# Altium PCB PCB1.PcbDoc
Units mm, origin at the board's own origin, x right, y up, seen from the top; angles counter-clockwise.
Board outline 90 x 65 mm, 2 copper layers (Top Layer, Bottom Layer); 58 components, 43 nets, 162 pads, 0 vias.
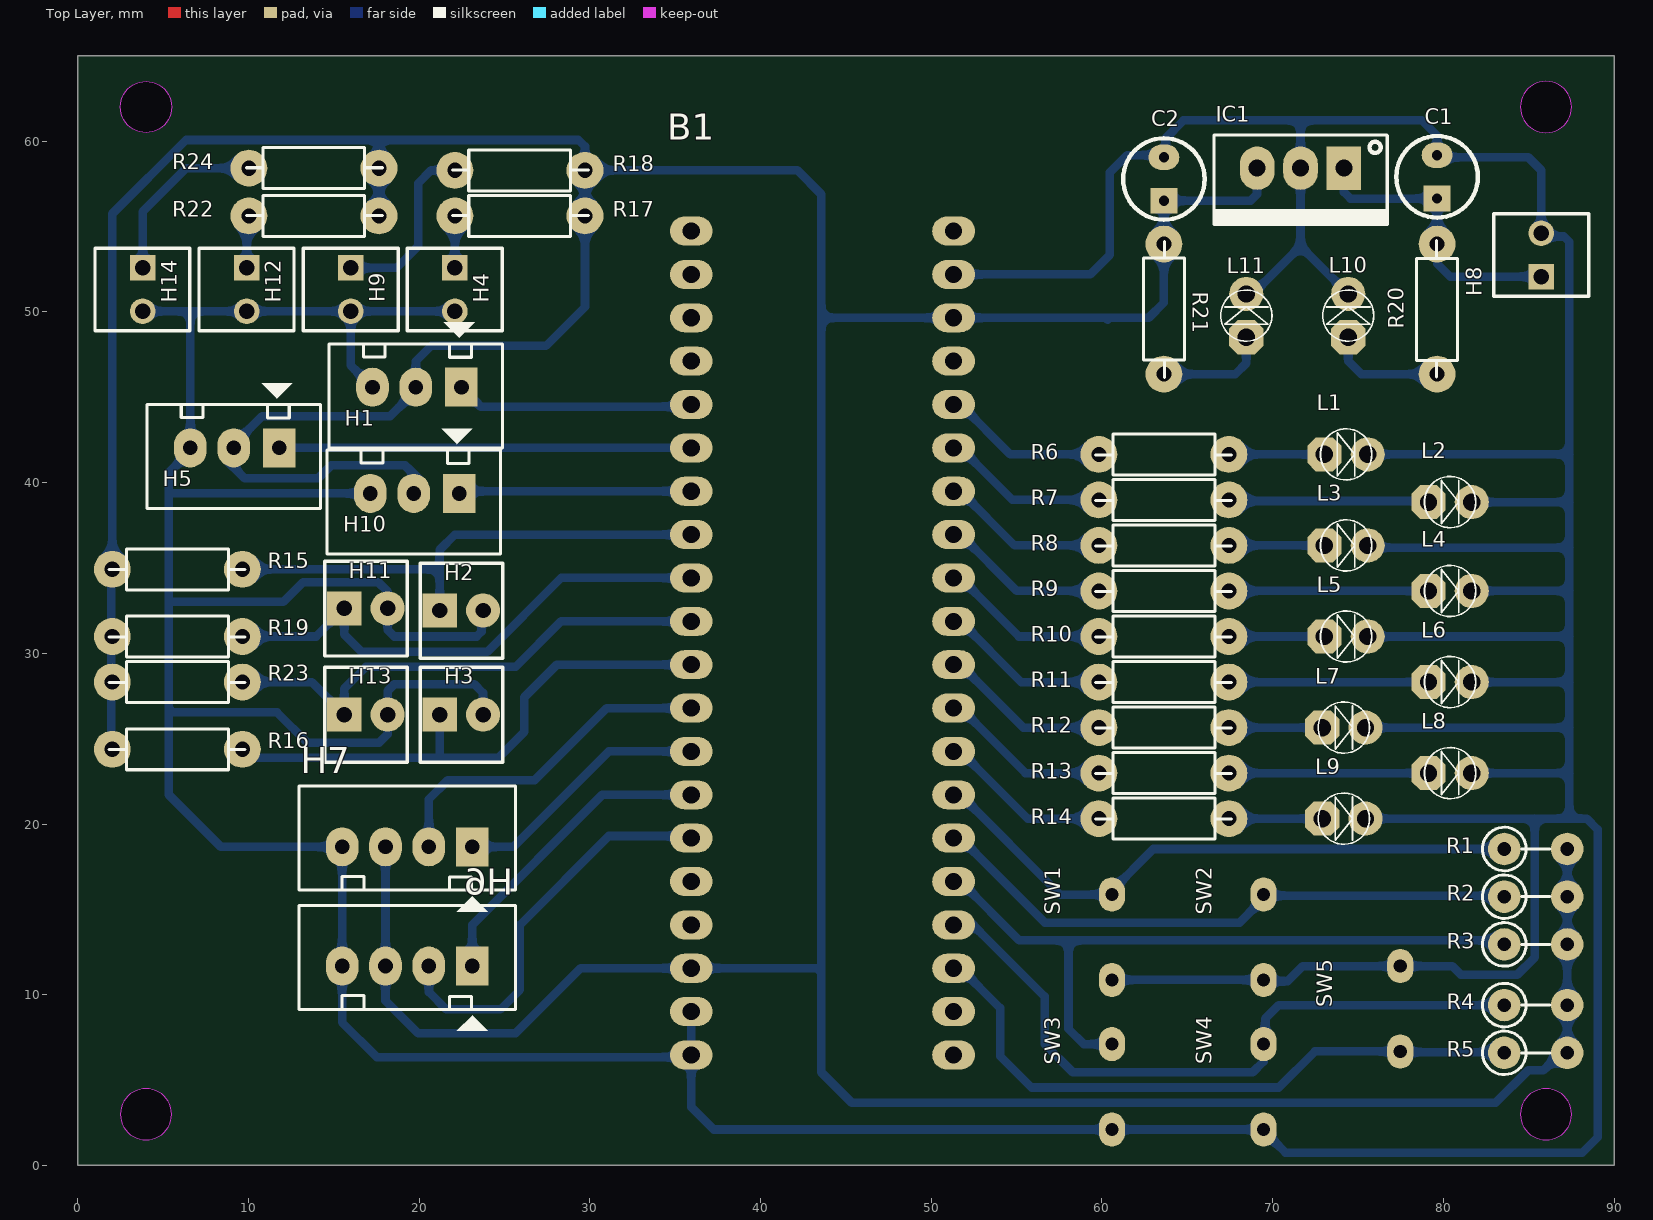
[diagram p0: Top Layer view]
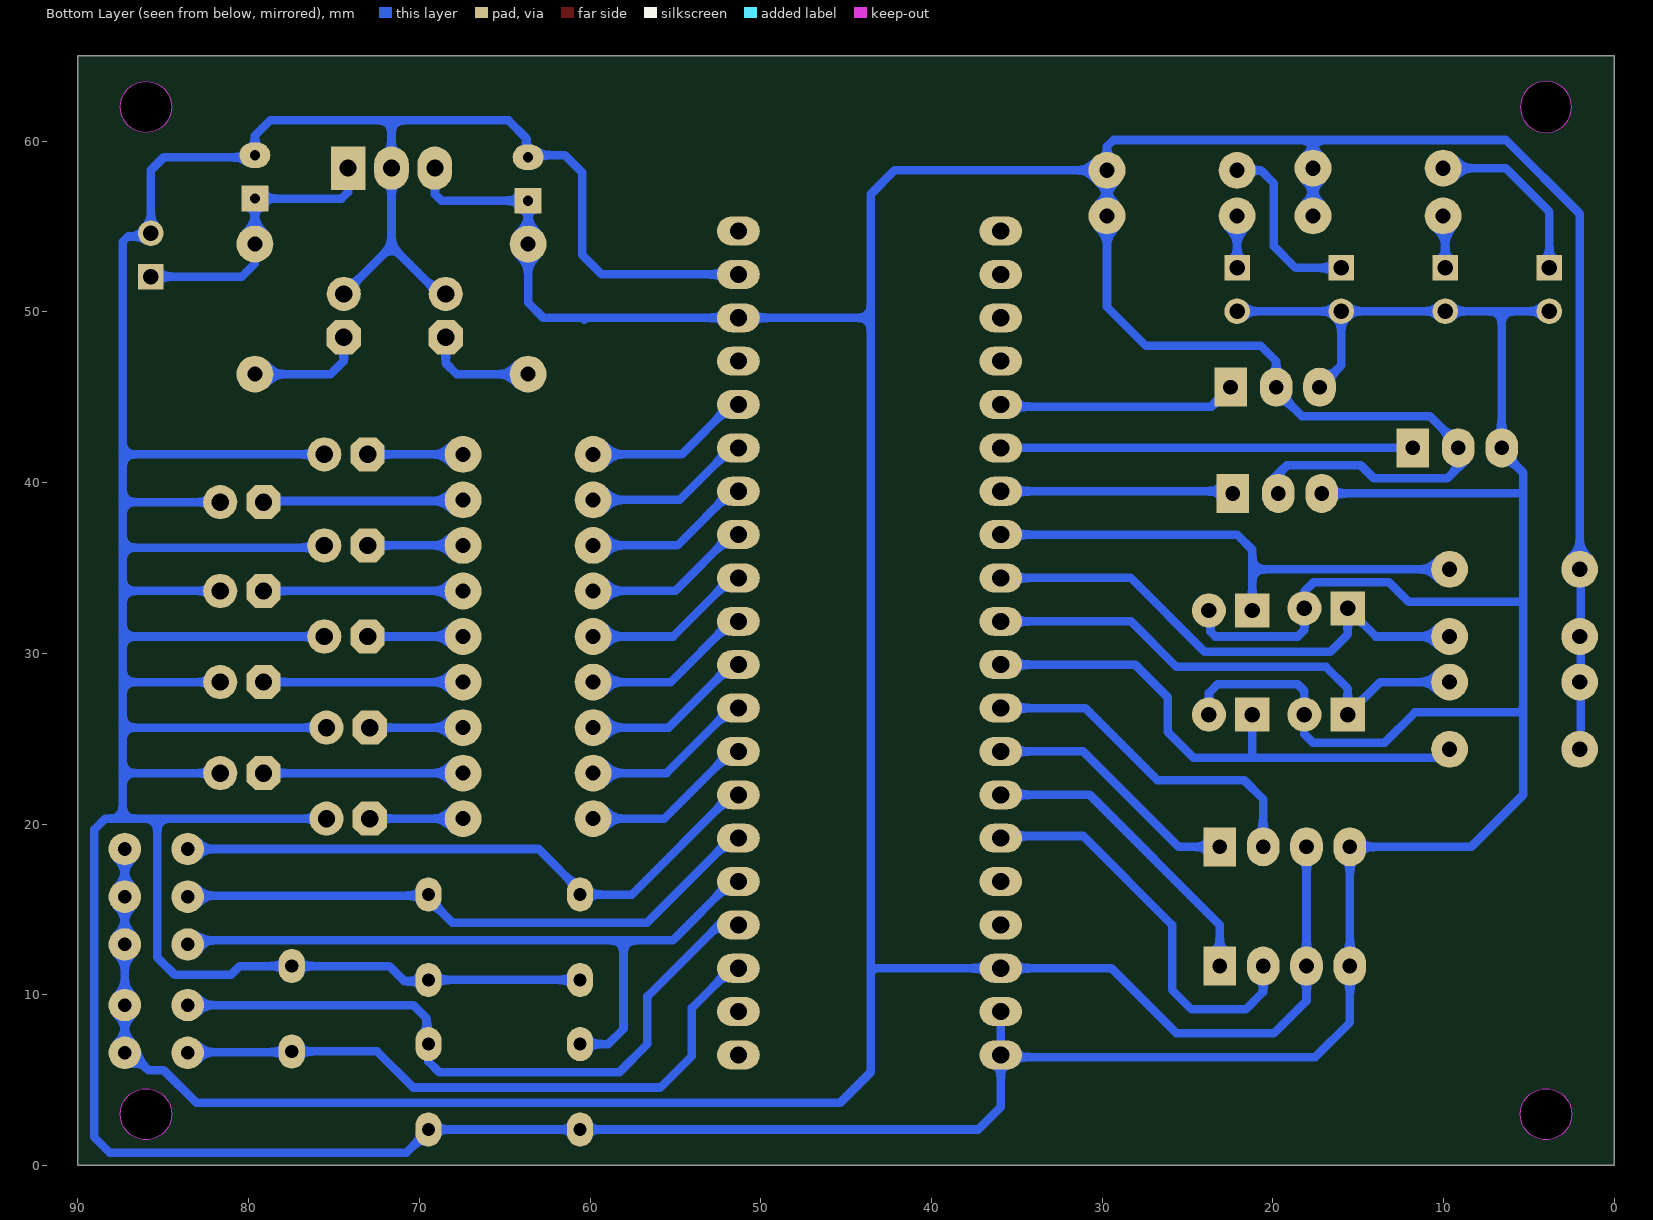
[diagram p1: Bottom Layer view, seen from below]
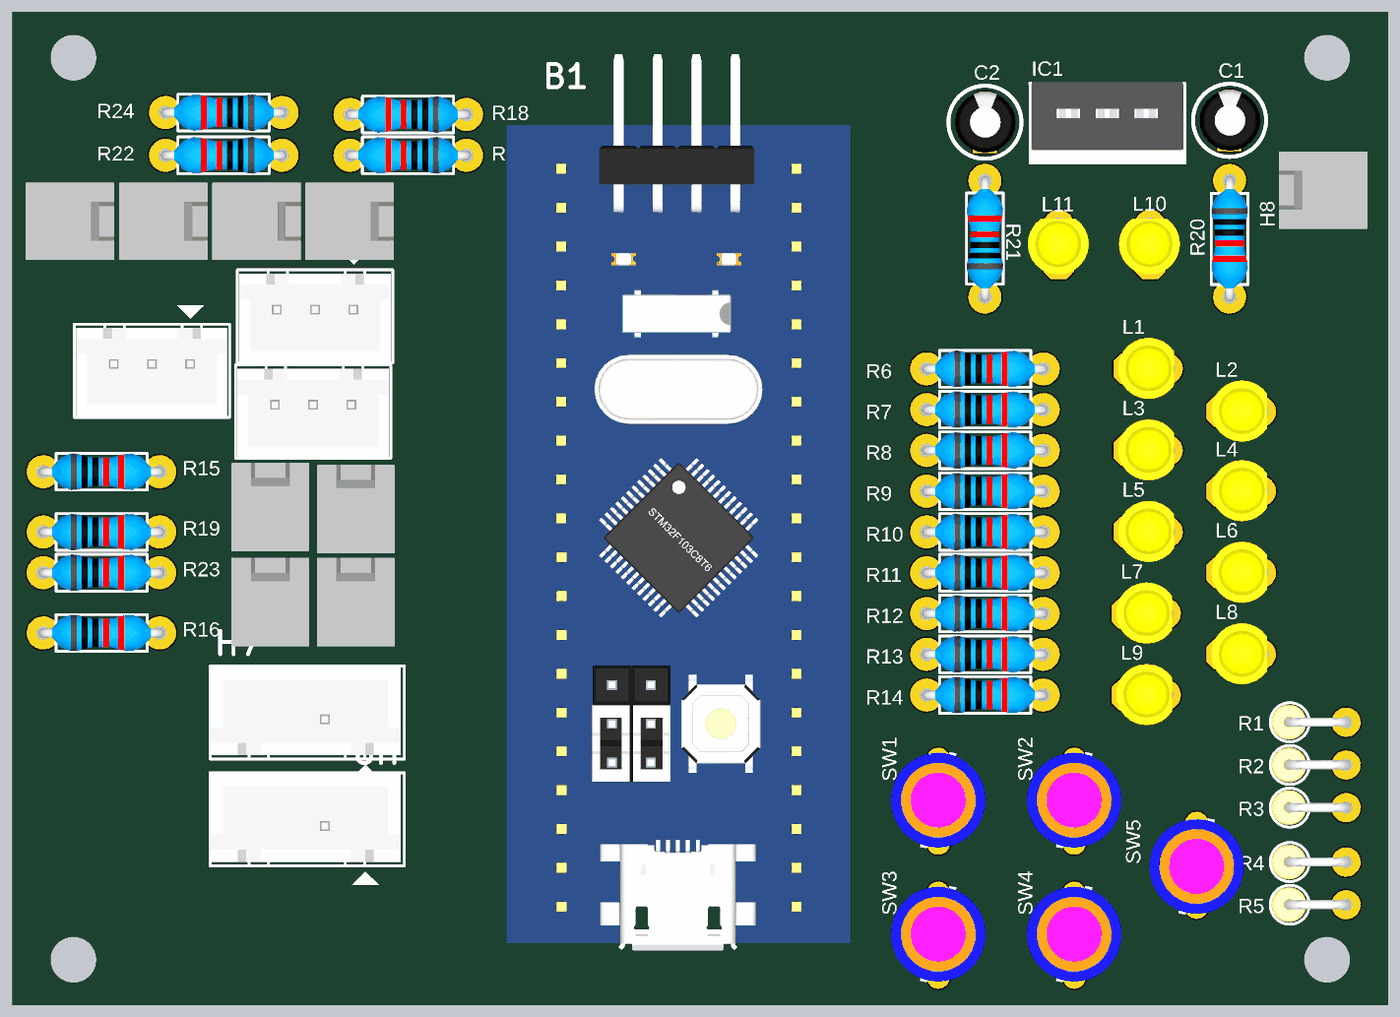
[diagram p2: 3D render of the assembled board from above, using the file's embedded part models]

## Layer stack, top to bottom
Top Solder: solder mask 0.0102, Solder Resist, Dk 3.5
Top Layer: signal copper 0.0356
Dielectric 1: dielectric 0.32, FR-4, Dk 4.8
Bottom Layer: signal copper 0.0356
Bottom Solder: solder mask 0.0102, Solder Resist, Dk 3.5

## Board outline
0.006,0.006 0.006,65.006 90.006,65.006 90.006,0.006
cut-out: 4.006,60.506 cw(c4.006,62.006) 2.506,62.006 cw(c4.006,62.006) 4.006,63.506 cw(c4.006,62.006) 5.506,62.006 cw(c4.006,62.006)
cut-out: 2.506,3.006 ccw(c4.006,3.006) 4.006,1.506 ccw(c4.006,3.006) 5.506,3.006 ccw(c4.006,3.006) 4.006,4.506 ccw(c4.006,3.006)
cut-out: 84.506,3.006 ccw(c86.006,3.006) 86.006,1.506 ccw(c86.006,3.006) 87.506,3.006 ccw(c86.006,3.006) 86.006,4.506 ccw(c86.006,3.006)
cut-out: 84.506,62.006 ccw(c86.006,62.006) 86.006,60.506 ccw(c86.006,62.006) 87.506,62.006 ccw(c86.006,62.006) 86.006,63.506 ccw(c86.006,62.006)

## Design rules (kind name [scope] priority, off if disabled: settings)
Clearance [All] p1: gap=0.254 ignorepadtopadclearanceinfootprint=FALSE except(0: Arc-Hole Track-Hole SMDPad-Hole THPad-Hole Via-Hole Fill-Hole Poly-Hole Region-Hole Text-Hole)
PolygonConnect [All] p1: connectstyle=Relief reliefconductorwidth=0.254 reliefentries=4 polygonreliefangle="90 Angle" airgapwidth=0.254
RoutingVias [All] p1: holewidth=0.711 width=1.27 viastyle="Through Hole" minholewidth=0.711 minwidth=1.27 maxholewidth=0.711 maxwidth=1.27
SolderMaskExpansion [All] p1: expansion=0.102
Width [All] p1: maxlimit=2 minlimit=0.5 preferedwidth=1 minimp=50.000000 maximp=50.000000 favimp=50.000000
30 further rules are at their usual default settings.

## Components (designator, comment, footprint, x,y, rotation, side; value= is the part's Value field where it differs from the comment)
B1 "STM32F103C8T6-BlueFill" STM32F1-Bluefill 51.308,54.737 r180 top
C1 "0.33" CA-ALU-2.54 79.629,57.912 r90 top value=104
C2 "0.1uF" CA-ALU-2.54 63.627,57.785 r90 top value=104
H1 "Header3" Header3 22.352,45.593 r180 top
H2 "Header2" HDR2#1 21.209,32.512 r0 top
H3 "Header2" HDR2#1 21.209,26.416 r0 top
H4 "Header2" HDR2#2 22.098,52.578 r270 top
H5 "Header3" Header3 11.684,42.037 r180 top
H6 "Header4" Header4 23.114,11.684 r180 top
H7 "Header4" Header4 23.114,18.669 r180 top
H8 "Header2" HDR2#2 85.725,52.07 r90 top
H9 "Header2" HDR2#2 16.002,52.578 r270 top
H10 "Header3" Header3 22.225,39.37 r180 top
H11 "Header2" HDR2#1 15.621,32.639 r0 top
H12 "Header2" HDR2#2 9.906,52.578 r270 top
H13 "Header2" HDR2#1 15.621,26.416 r0 top
H14 "Header2" HDR2#2 3.81,52.578 r270 top
IC1 "LM78xx" TO220-123 74.168,58.42 r180 top
L1 "LED" LED-3MM-YELLOW 73.025,41.656 r0 top value="LED 3 ly Single Colour"
L2 "LED" LED-3MM-YELLOW 79.121,38.862 r0 top value="LED 3 ly Single Colour"
L3 "LED" LED-3MM-YELLOW 73.025,36.322 r0 top value="LED 3 ly Single Colour"
L4 "LED" LED-3MM-YELLOW 79.121,33.655 r0 top value="LED 3 ly Single Colour"
L5 "LED" LED-3MM-YELLOW 73.025,30.988 r0 top value="LED 3 ly Single Colour"
L6 "LED" LED-3MM-YELLOW 79.121,28.321 r0 top value="LED 3 ly Single Colour"
L7 "LED" LED-3MM-YELLOW 72.898,25.654 r0 top value="LED 3 ly Single Colour"
L8 "LED" LED-3MM-YELLOW 79.121,22.987 r0 top value="LED 3 ly Single Colour"
L9 "LED" LED-3MM-YELLOW 72.898,20.32 r0 top value="LED 3 ly Single Colour"
L10 "LED" LED-3MM-YELLOW 74.422,48.514 r90 top value="LED 3 ly Single Colour"
L11 "LED" LED-3MM-YELLOW 68.453,48.514 r90 top value="LED 3 ly Single Colour"
R1 "10K" RES-1/4WD 85.217,18.542 r0 top
R2 "10K" RES-1/4WD 85.217,15.748 r0 top
R3 "10K" RES-1/4WD 85.217,12.954 r0 top
R4 "10K" RES-1/4WD 85.217,9.398 r0 top
R5 "10K" RES-1/4WD 85.217,6.604 r0 top
R6 "330" RES-1/4W-SMALL 63.373,41.656 r0 top
R7 "330" RES-1/4W-SMALL 63.373,38.989 r0 top
R8 "330" RES-1/4W-SMALL 63.373,36.322 r0 top
R9 "330" RES-1/4W-SMALL 63.373,33.655 r0 top
R10 "330" RES-1/4W-SMALL 63.373,30.988 r0 top
R11 "330" RES-1/4W-SMALL 63.373,28.321 r0 top
R12 "330" RES-1/4W-SMALL 63.373,25.654 r0 top
R13 "330" RES-1/4W-SMALL 63.373,22.987 r0 top
R14 "330" RES-1/4W-SMALL 63.373,20.32 r0 top
R15 "10K" RES-1/4W-SMALL 5.588,34.925 r0 top
R16 "10K" RES-1/4W-SMALL 5.588,24.384 r0 top
R17 "330" RES-1/4W-SMALL 26.162,55.626 r180 top
R18 "330" RES-1/4W-SMALL 26.162,58.293 r180 top
R19 "10K" RES-1/4W-SMALL 5.588,30.988 r0 top
R20 "Res" RES-1/4W-SMALL 79.629,50.419 r270 top
R21 "Res" RES-1/4W-SMALL 63.627,49.911 r90 top
R22 "330" RES-1/4W-SMALL 14.097,55.626 r180 top
R23 "10K" RES-1/4W-SMALL 5.588,28.321 r0 top
R24 "330" RES-1/4W-SMALL 14.097,58.42 r180 top
SW1 "D5" D5 60.579,10.875 r90 top
SW2 "D5" D5 69.469,10.875 r90 top
SW3 "D5" D5 60.579,2.112 r90 top
SW4 "D5" D5 69.469,2.112 r90 top
SW5 "D5" D5 77.47,11.684 r270 top

## Footprints (in the part's own frame and the unit in brackets; to place one, negate y for a bottom-side part, rotate by r counter-clockwise, add the part's x,y. Pads: shape width x height; smd on the part's side, far side on the other; paste and mask are expansions set on the pad)
CA-ALU-2.54 [mm]
  rect 1.5x1.58 hole 0.6: 1(-1.27,0)
  oval 1.5x1.8 hole 0.6: 2(1.27,0)
  silkscreen extent -2.39,-2.39 2.39,2.39, body extent -2,-2.03 1.99,1.97, height 7.01
D5 [mil]
  oval 78.74x60 hole 30: 1(0,0) 2(196.85,0)
  body extent -45,-142 247,142, height 169
HDR2#1 [mm] "Connector; Header; 2 Position"
  rect 2x2 hole 0.9: 1(0,0)
  round 2 hole 0.9: 2(2.54,0)
  silkscreen extent -1.14,-2.79 3.68,2.77, body extent -1.27,-2.92 3.81,2.88, height 11.72
HDR2#2 [mm] "Connector; Header; 2 Position"
  rect 1.5x1.5 hole 0.9: 1(0,0)
  round 1.5 hole 0.9: 2(2.54,0)
  silkscreen extent -1.14,-2.79 3.68,2.77, body extent -1.27,-2.92 3.81,2.88, height 11.72
Header3 [mil] "CON 3"
  rect 75x90 hole 34: 1(-5,0)
  oval 75x90 hole 34: 2(100,0) 3(200,0)
  silkscreen extent -100,-150 300,140, body extent -95,-90 295,136, height 276
Header4 [mil] "CON4"
  rect 75x90 hole 34: 1(0,0)
  oval 75x90 hole 34: 2(100,0) 3(200,0) 4(300,0)
  silkscreen extent -100,-140 400,150, body extent -90,-136 398,90, height 276
LED-3MM-YELLOW [mm]
  oct 2x2 hole 1.016: 1(0,0)
  round 2 hole 1.016: 2(2.54,0)
  silkscreen extent -0.23,-1.5 2.77,1.5, body extent -0.69,-1.97 2.98,2.03, height 4.6
RES-1/4W-SMALL [mil]
  round 85 hole 35: 1(-140,0) 2(160,0)
  silkscreen extent -148,-47 166,47, body extent -152,-47 172,47, height 97
RES-1/4WD [mm]
  round 1.905 hole 0.8: 1(-1.651,0) 2(2.032,0)
  silkscreen extent -2.92,-1.28 1.02,1.28, body extent -2.85,-1.14 2.35,1.16, height 9.64
STM32F1-Bluefill [mm]
  oval 2.5x1.7 hole 1: 1(0,0) 2(0,2.54) 3(0,5.08) 4(0,7.62) 5(0,10.16) 6(0,12.7) 7(0,15.24) 8(0,17.78) 9(0,20.32) 10(0,22.86) 11(0,25.4) 12(0,27.94) 13(0,30.48) 14(0,33.02) 15(0,35.56) 16(0,38.1) 17(0,40.64) 18(0,43.18) 19(0,45.72) 20(0,48.26) 21(15.367,0) 22(15.367,2.54) 23(15.367,5.08) 24(15.367,7.62) 25(15.367,10.16) 26(15.367,12.7) 27(15.367,15.24) 28(15.367,17.78) 29(15.367,20.32) 30(15.367,22.86) 31(15.367,25.4) 32(15.367,27.94) 33(15.367,30.48) 34(15.367,33.02) 35(15.367,35.56) 36(15.367,38.1) 37(15.367,40.64) 38(15.367,43.18) 39(15.367,45.72) 40(15.367,48.26)
  body extent -3.53,-7.52 18.97,51.12, height 11.51
TO220-123 [mil] "TO-220 - 1-2-3"
  rect 80x100 hole 39: 1(0,0)
  oval 80x100 hole 39: 2(100,0) 3(200,0)
  silkscreen extent -100,-76 300,130, body extent -95,-80 295,97, height 323

## Part data
C1 C2: library part CN-ALU-DIP, "Capacitor (Semiconductor SIM Model)", LatestRevisionDate=17-Jul-2002, LatestRevisionNote="Re-released for DXP Platform.", PackageReference=C1206, Publisher="Altium Limited"
H1 H5 H10: "Header IDC, 3 x 1 Pin Vertical 2.54mm Pitch (Non-Boxed, Male)", Manufacturer="Würth Elektronik eiSos GmbH", partNo=613002143121, ComponentLink1 Description=Manufacturer, ComponentLink1URL=http://www.we-online.com, ComponentLink2 Description=Datasheet, ComponentLink2URL=http://katalog.we-online.de/em/datasheet/6130xx143121.pdf, Created by="Karrer Zheng", Created Date="29 March 2013", NoPins=02
H2 H3 H4 H8 H9 H11 H12 H13 H14: "Header IDC, 2 x 1 Pin Vertical 2.54mm Pitch (Non-Boxed, Male)", Manufacturer="Würth Elektronik eiSos GmbH", partNo=613002143121, ComponentLink1 Description=Manufacturer, ComponentLink1URL=http://www.we-online.com, ComponentLink2 Description=Datasheet, ComponentLink2URL=http://katalog.we-online.de/em/datasheet/6130xx143121.pdf, Created by="Karrer Zheng", Created Date="29 March 2013", NoPins=02
H6 H7: "Header IDC, 4 x 1 Pin Vertical 2.54mm Pitch (Non-Boxed, Male)", Manufacturer="Würth Elektronik eiSos GmbH", partNo=613002143121, ComponentLink1 Description=Manufacturer, ComponentLink1URL=http://www.we-online.com, ComponentLink2 Description=Datasheet, ComponentLink2URL=http://katalog.we-online.de/em/datasheet/6130xx143121.pdf, Created by="Karrer Zheng", Created Date="29 March 2013", NoPins=02
IC1: "Positive Voltage Regulator", ComponentLink1Description="Manufacturer Link", ComponentLink1URL=http://www.st.com/, ComponentLink2Description=Datasheet, ComponentLink2URL=http://www.st.com/stonline/products/literature/ds/2146/l78m05c.pdf, DatasheetVersion=Apr-1994, LatestRevisionDate=17-Jul-2002, LatestRevisionNote="Re-released for DXP Platform.", Note="Tab is connected to pin 3 (GND).", PackageDescription="TO, Thru-Hole, Vertical, Heatsink Mounted; 3 In-Line Leads; Pitch 2.54 mm; Pin sequence 1, 3, 2", PackageReference=ISOWATT220AB, PackageVersion=Jul-1998, Published=24-Aug-2001, Publisher="Altium Limited"
L1 L2 L3 L4 L5 L6 L7 L8 L9 L10 L11: "LED Single colour Green and Red"
R1 R2 R3 R4 R5 R6 R7 R8 R9 R10 R11 R12 R13 R14 R15 R16 R17 R18 R19 R22 R23 R24: library part Res, "Res", Manufacturer="Generic Components", Class=Passive, Published=08/06/2000, Publisher="Altium Hobart Technology Centre", SubClass=R
R20 R21: Manufacturer="Generic Components", Class=Passive, Published=08/06/2000, Publisher="Altium Hobart Technology Centre", SubClass=R

## Nets (pads, with @x,y where several pads share a name; then routed paths per layer and width w, separated by ;. In a path a pad name is that pad's centre, name@x,y a point inside that pad or via, vN(x,y) a via of type N, cw(c..) or ccw(c..) an arc to the next point about the centre after c; other vN are vias at no path point)
+5: B1.3 B1.38 C2.1 H1.2 H5.2 H6.3 H7.3 H10.2 IC1.3 R1.2 R2.2 R3.2 R4.2 R5.2 R15.1 R16.1 R17.1 R18.1 R19.1 R21.2 R22.1 R23.1 R24.1 | length 307.8
  Bottom Layer w0.5: R16.1@1.968,24.384 1.968,28.321 1.968,30.988 1.968,34.861 R15.1 2.032,55.753 6.35,60.071 17.653,60.071 ; R22.1 R24.1 17.653,60.071 ; H7.3 H6.3 18.034,9.652 19.939,7.747 25.654,7.747 29.464,11.557 B1.38 43.307,11.557 43.561,11.303 ; H10.2 19.685,40.513 19.177,41.021 14.859,41.021 14.097,40.259 9.779,40.259 9.144,40.894 H5.2 9.144,42.227 10.814,43.898 18.307,43.898 19.812,45.402 H1.2 19.812,47.117 20.701,48.006 27.432,48.006 29.718,50.292 R17.1 R18.1 ; 60.325,49.53 60.198,49.657 ; IC1.3 69.088,56.896 68.707,56.515 C2.1 R21.2 63.627,50.546 62.738,49.657 60.198,49.657 ; R1.2 R2.2 R3.2 R4.2 R5.2 86.873,6.604 85.857,5.588 84.963,5.588 83.058,3.683 45.339,3.683 43.561,5.461 43.561,11.049 43.561,11.303 ; 17.653,60.071 29.337,60.071 29.718,59.69 R18.1 ; R18.1 42.164,58.293 43.561,56.896 43.561,49.657 ; 43.561,11.303 43.561,49.657 ; 43.561,49.657 B1.3 60.198,49.657
+12: C1.1 H8.1 IC1.1 R20.1 | length 17.2
  Bottom Layer w0.5: IC1.1 74.168,57.023 74.549,56.642 C1.1 R20.1 79.629,52.832 80.391,52.07 H8.1
ADC0: B1.25 H1.1 | length 14.1
  Bottom Layer w0.5: H1.1 22.479,45.402 23.182,44.7 23.372,44.7 23.622,44.45 35.814,44.45 B1.25
ADC1: B1.26 H5.1 | length 24.1
  Bottom Layer w0.5: H5.1 B1.26
ADC2: B1.27 H10.1 | length 13.6
  Bottom Layer w0.5: H10.1 22.479,39.497 B1.27
ADC3: B1.28 H2.1 R15.2 | length 30.2
  Bottom Layer w0.5: R15.2 21.209,34.925 ; H2.1 21.209,34.925 ; B1.28 22.098,36.957 21.209,36.068 21.209,34.925
ADC4: B1.29 H11.1 R19.2 | length 30.7
  Bottom Layer w0.5: R19.2 13.97,30.988 H11.1 15.621,31.115 16.637,30.099 24.003,30.099 28.321,34.417 B1.29
ADC5: B1.30 H13.1 R23.2 | length 30.2
  Bottom Layer w0.5: R23.2 13.716,28.321 H13.1 15.621,27.94 16.891,29.21 25.654,29.21 28.321,31.877 B1.30
ADC6: B1.31 H3.1 R16.2 | length 32.4
  Bottom Layer w0.5: R16.2 10.16,23.876 21.209,23.876 24.638,23.876 26.162,25.4 26.162,27.432 28.067,29.337 B1.31 ; 21.209,24.003 H3.1
BUTTON0: B1.14 R1.1 SW1.2 | length 35.9
  Bottom Layer w0.5: B1.14 51.708,21.717 57.55,15.875 SW1.2 60.579,16.113 63.008,18.542 R1.1
BUTTON1: B1.15 R2.1 SW2.2 | length 35.2
  Bottom Layer w0.5: B1.15 51.708,19.177 56.661,14.224 68.056,14.224 69.469,15.637 SW2.2 69.532,15.811 83.502,15.811 R2.1
BUTTON2: B1.16 R3.1 SW3.2 | length 41.9
  Bottom Layer w0.5: B1.16 51.708,16.637 55.157,13.188 58.039,13.188 ; SW3.2 58.928,7.112 58.039,8.001 58.039,13.188 ; R3.1 83.332,13.188 63.881,13.188 63.881,13.208 63.861,13.188 58.039,13.188
BUTTON3: B1.17 R4.1 SW4.2 | length 40.5
  Bottom Layer w0.5: B1.17 52.451,14.097 56.642,9.906 56.642,7.112 58.293,5.461 68.834,5.461 69.469,6.096 SW4.2 69.568,7.211 69.568,8.608 70.358,9.398 R4.1
BUTTON4: B1.18 R5.1 SW5.2 | length 37.7
  Bottom Layer w0.5: B1.18 51.708,11.557 54.036,9.229 54.036,6.416 55.88,4.572 70.358,4.572 72.47,6.684 SW5.2 77.51,6.644 83.526,6.644 R5.1
DIV_A: B1.32 H7.2 | length 20.4
  Bottom Layer w0.5: H7.2 20.574,21.463 21.68,22.569 26.76,22.569 30.988,26.797 B1.32
DIV_B: B1.35 H6.2 | length 23.8
  Bottom Layer w0.5: H6.2 20.574,10.16 21.59,9.144 24.765,9.144 25.908,10.287 25.908,14.097 31.115,19.304 35.814,19.304 B1.35
GND: B1.2 B1.39 B1.40 C1.2 C2.2 H1.3 H2.2 H3.2 H4.2 H5.3 H6.4 H7.4 H8.2 H9.2 H10.3 H11.2 H12.2 H13.2 H14.2 IC1.2 L1.2 L2.2 L3.2 L4.2 L5.2 L6.2 L7.2 L8.2 L9.2 L10.2 L11.2 SW1.1 SW2.1 SW3.1 SW4.1 SW5.1 | length 448.1
  Bottom Layer w0.5: H14.2 6.604,50.038 ; 5.461,33.02 12.057,33.02 13.208,34.171 17.606,34.171 18.161,33.616 H11.2 18.161,31.369 18.542,30.988 23.368,30.988 23.661,31.281 23.661,32.424 H2.2 ; H10.3 5.334,39.37 ; H1.3 16.002,46.863 H9.2 ; H4.2 H9.2 ; H3.2 23.749,27.686 23.241,28.194 18.542,28.194 18.161,27.813 H13.2 18.161,25.273 17.653,24.765 13.462,24.765 11.684,26.543 5.588,26.543 5.334,26.797 ; B1.39 B1.40 ; B1.2 59.309,52.197 60.452,53.34 60.452,58.166 61.468,59.182 63.5,59.182 C2.2 63.73,59.158 63.73,60.174 64.77,61.214 71.628,61.214 ; SW1.1 SW2.1 69.549,10.795 70.866,10.795 71.755,11.684 SW5.1 80.518,11.684 81.026,11.176 84.328,11.176 85.344,12.192 85.344,20.32 ; L11.2 68.834,51.054 71.628,53.848 ; L10.2 71.628,53.848 ; L9.2 85.344,20.32 ; L7.2 87.376,25.654 ; L5.2 87.376,30.988 ; L3.2 75.692,36.195 87.376,36.195 ; L1.2 87.376,41.656 ; L8.2 87.376,22.987 ; L6.2 87.376,28.321 ; L4.2 87.376,33.655 ; L2.2 87.376,38.862 ; 5.334,26.797 5.334,21.717 8.382,18.669 H7.4 H6.4 15.494,8.382 17.526,6.35 35.814,6.35 B1.40 ; 5.334,26.797 5.334,33.02 5.334,39.37 ; 5.334,39.37 5.334,40.576 6.604,41.846 H5.3 6.604,50.038 ; 6.604,50.038 H12.2 H9.2 ; B1.40 35.941,3.429 37.258,2.112 SW3.1 SW4.1 69.469,2.042 70.749,0.762 88.138,0.762 89.027,1.651 89.027,19.685 88.392,20.32 87.376,20.32 ; 71.628,53.848 IC1.2 71.628,61.214 ; 71.628,61.214 78.74,61.214 79.629,60.325 C1.2 79.756,59.055 84.963,59.055 85.725,58.293 H8.2 85.916,54.419 87.059,54.419 87.376,54.102 87.376,41.656 ; 85.344,20.32 87.376,20.32 ; 87.376,20.32 87.376,22.987 ; 87.376,22.987 87.376,25.654 ; 87.376,25.654 87.376,28.321 ; 87.376,28.321 87.376,30.988 ; 87.376,30.988 87.376,33.655 ; 87.376,33.655 87.376,36.195 ; 87.376,36.195 87.376,38.862 ; 87.376,38.862 87.376,41.656
LED1: B1.5 R6.1 | length 9.7
  Bottom Layer w0.5: B1.5 51.708,44.577 54.629,41.656 R6.1
LED2: B1.6 R7.1 | length 9.8
  Bottom Layer w0.5: B1.6 51.708,42.037 54.756,38.989 R7.1
LED3: B1.7 R8.1 | length 9.8
  Bottom Layer w0.5: B1.7 51.708,39.497 54.883,36.322 R8.1
LED4: B1.8 R9.1 | length 9.9
  Bottom Layer w0.5: B1.8 51.708,36.957 55.01,33.655 R9.1
LED5: B1.9 R10.1 | length 9.9
  Bottom Layer w0.5: B1.9 51.708,34.417 55.137,30.988 R10.1
LED6: B1.10 R11.1 | length 10
  Bottom Layer w0.5: B1.10 51.708,31.877 55.264,28.321 R11.1
LED7: B1.11 R12.1 | length 10
  Bottom Layer w0.5: B1.11 51.708,29.337 55.391,25.654 R12.1
LED8: B1.12 R13.1 | length 10.1
  Bottom Layer w0.5: B1.12 51.708,26.797 55.518,22.987 R13.1
LED9: B1.13 R14.1 | length 10.1
  Bottom Layer w0.5: B1.13 51.708,24.257 55.645,20.32 R14.1
NetH4_1: H4.1 R17.2 | length 3
  Bottom Layer w0.5: H4.1 R17.2
NetH9_1: H9.1 R18.2 | length 10.6
  Bottom Layer w0.5: H9.1 18.669,52.578 19.939,53.848 19.939,57.531 20.701,58.293 R18.2
NetH12_1: H12.1 R22.2 | length 3.1
  Top Layer w0.5: R22.2@9.906,55.499 R22.2
  Bottom Layer w0.5: H12.1 R22.2@9.906,55.499
NetH14_1: H14.1 R24.2 | length 10.6
  Bottom Layer w0.5: H14.1 3.81,55.88 6.35,58.42 R24.2
NetL1_1: L1.1 R6.2 | length 5.6
  Bottom Layer w0.5: R6.2 L1.1
NetL2_1: L2.1 R7.2 | length 11.7
  Top Layer w0.5: R7.2 R7.2@67.501,38.925 ; L2.1@79.057,38.925 L2.1
  Bottom Layer w0.5: R7.2@67.501,38.925 L2.1@79.057,38.925
NetL3_1: L3.1 R8.2 | length 5.6
  Bottom Layer w0.5: R8.2 L3.1
NetL4_1: L4.1 R9.2 | length 11.7
  Bottom Layer w0.5: R9.2 L4.1
NetL5_1: L5.1 R10.2 | length 5.6
  Bottom Layer w0.5: R10.2 L5.1
NetL6_1: L6.1 R11.2 | length 11.7
  Bottom Layer w0.5: R11.2 L6.1
NetL7_1: L7.1 R12.2 | length 5.5
  Bottom Layer w0.5: R12.2 L7.1
NetL8_1: L8.1 R13.2 | length 11.7
  Bottom Layer w0.5: R13.2 L8.1
NetL9_1: L9.1 R14.2 | length 5.5
  Bottom Layer w0.5: R14.2 L9.1
NetL10_1: L10.1 R20.2 | length 6.9
  Bottom Layer w0.5: L10.1 74.422,47.117 75.184,46.355 R20.2
NetL11_1: L11.1 R21.1 | length 6.8
  Bottom Layer w0.5: R21.1@63.5,46.609 63.754,46.355 67.818,46.355 68.453,46.99 L11.1
PWM_A: B1.33 H7.1 | length 15.1
  Bottom Layer w0.5: H7.1 25.527,18.669 31.115,24.257 B1.33
PWM_B: B1.34 H6.1 | length 18.4
  Bottom Layer w0.5: H6.1 23.114,14.097 30.734,21.717 B1.34
pads on no net: B1.1 B1.4 B1.19 B1.20 B1.21 B1.22 B1.23 B1.24 B1.36 B1.37

## Silkscreen, mask and mechanical layers (free items; w line width, h text height)
Mechanical 1:
  circle w0.5: c4.006,3.006 r1.5
  circle w0.5: c86.006,3.006 r1.5
  circle w0.5: c4.006,62.006 r1.5
  circle w0.5: c86.006,62.006 r1.5
  lines w0.3: 0.006,0.006 0.006,65.006 90.006,65.006 90.006,0.006 0.006,0.006